# Altium PCB MB1710051255.PcbDoc (part 4 of 4)
Units mm, origin at the board's own origin, x right, y up, seen from the top; angles counter-clockwise.
Board outline 209.55 x 153.67 mm, 2 copper layers (Top Layer, Bottom Layer); 288 components, 212 nets, 1030 pads, 414 vias.
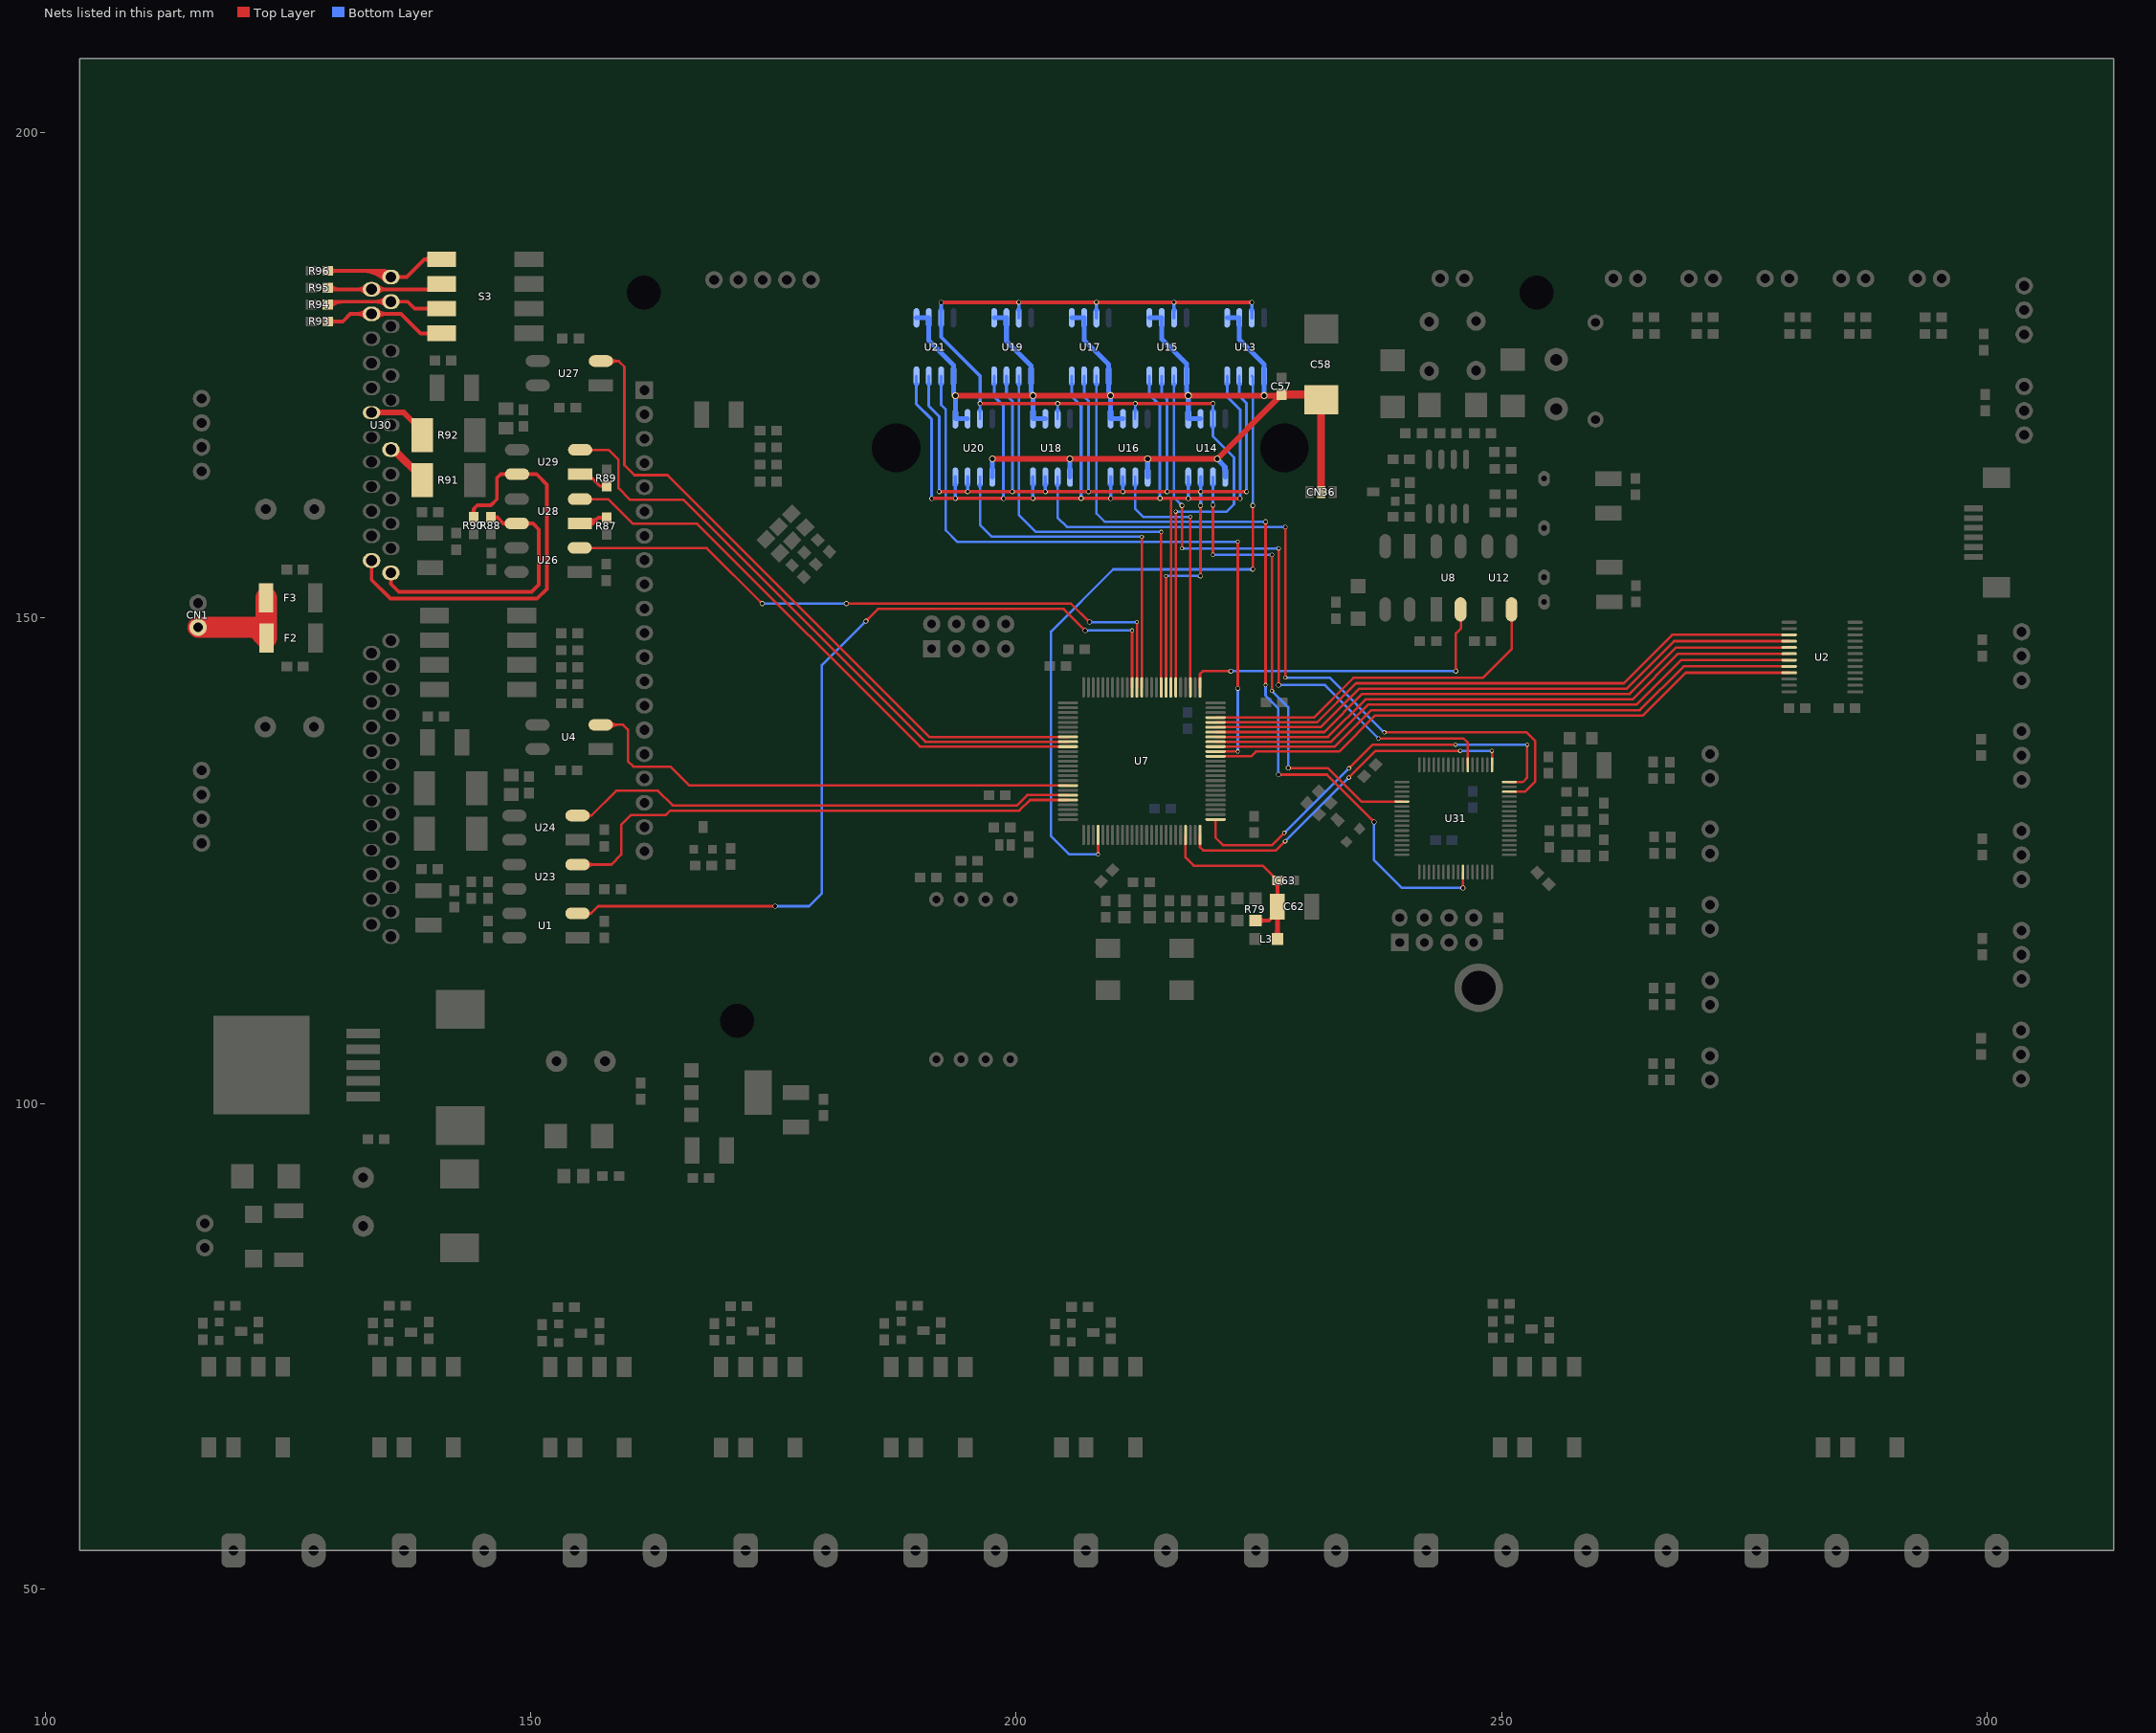
[diagram p4: the nets of this part, all layers, seen from the top]

## Via types
v1: diameter 0.7, hole 0.5, Top Layer to Bottom Layer, 231 vias
v2: diameter 0.5, hole 0.38, Top Layer to Bottom Layer, 67 vias
v3: diameter 0.5, hole 0.35, Top Layer to Bottom Layer, 64 vias
v4: diameter 0.42, hole 0.3, Top Layer to Bottom Layer, 27 vias
v5: diameter 0.45, hole 0.32, Top Layer to Bottom Layer, 8 vias
v6: diameter 0.8, hole 0.6, Top Layer to Bottom Layer, 8 vias
v7: diameter 1, hole 0.8, Top Layer to Bottom Layer, 4 vias
v8: diameter 0.45, hole 0.35, Top Layer to Bottom Layer, 3 vias
v9: diameter 1.2, hole 1, Top Layer to Bottom Layer, 1 vias
v10: diameter 0.6, hole 0.45, Top Layer to Bottom Layer, 1 vias

## Nets (pads, with @x,y where several pads share a name; then routed paths per layer and width w, separated by ;. In a path a pad name is that pad's centre, name@x,y a point inside that pad or via, vN(x,y) a via of type N, cw(c..) or ccw(c..) an arc to the next point about the centre after c; other vN are vias at no path point) (continued)
NetR87_1: R87.1 U28.1 | length 7
  Top Layer w0.38: U28.1@155.054,159.745 156.367,159.745 ; U28.1@155.716,159.772 ccw(c156.018,160.465) 156.552,159.931 ; U28.1@155.868,160.121 ccw(c156.257,161.014) 156.947,160.325 ; U28.1@156.071,159.562 cw(c156.367,159.414) 156.367,159.745 ; U28.1@156.071,159.928 ccw(c156.367,160.076) 156.367,159.745 ; R87.1@157.591,160.106 ccw(c157.062,159.576) 157.062,160.325 ccw(c157.062,161.073) R87.1@157.591,160.544 ; R87.1@157.81,160.325 156.947,160.325 ; 156.367,159.745 156.947,160.325
NetR88_2: R88.2 U28.4 U30.1 | length 30.1
  Top Layer w0.38: U30.1@135.592,154.652 135.592,153.511 136.398,152.705 150.089,152.705 150.825,153.441 150.825,159.131 150.211,159.745 U28.4@148.554,159.745 147.138,159.745 ; R88.2@145.872,160.374 146.509,160.374 ; R88.2@146.116,160.183 cw(c146.509,159.875) 146.509,160.374 ; R88.2@146.116,160.565 ccw(c146.509,160.873) 146.509,160.374 ; U28.4@147.563,159.517 ccw(c147.138,159.235) 147.138,159.745 ; U28.4@147.563,159.972 cw(c147.138,160.255) 147.138,159.745 ; 146.509,160.374 147.138,159.745
NetR89_1: R89.1 U29.1 | length 4.1
  Top Layer w0.3: U29.1@155.079,164.825 155.901,164.825 157.15,163.576 ; R89.1@157.521,163.38 ccw(c157.15,163.128) 157.15,163.576 ; R89.1@157.521,163.772 cw(c157.15,164.024) 157.15,163.576 ; R89.1@157.81,163.576 157.15,163.576
NetR90_1: R90.1 U29.4 U30.2 | length 44.9
  Top Layer w0.38: U30.2@133.592,155.922 133.592,153.936 135.534,151.994 150.647,151.994 151.663,153.01 151.663,163.754 150.592,164.825 U29.4@148.579,164.825 146.892,164.825 146.507,164.44 146.507,162.23 145.898,161.62 144.475,161.62 144.094,161.239 R90.1@144.094,160.376 ; R90.1@143.875,160.645 ccw(c143.346,161.174) 144.094,161.174 ccw(c144.843,161.174) R90.1@144.313,160.645
NetR91_2: R91.2 U30.11 | length 4.7
  Top Layer w0.8: U30.11@135.592,167.352 135.873,167.352 138.829,164.396 R91.2@138.829,164.186
NetR92_2: R92.2 U30.14 | length 6.4
  Top Layer w0.6: U30.14@133.592,171.162 136.915,171.162 138.829,169.248 R92.2@138.829,168.859
NetR93_2: R93.2 S3.8 U30.22 | length 18.3
  Top Layer w0.38: R93.2@129.081,180.543 130.632,180.543 131.411,181.322 U30.22@133.592,181.322 136.635,181.322 138.633,179.324 S3.8@140.809,179.324 ; R93.2@129.35,180.324 cw(c129.879,179.795) 129.879,180.543 cw(c129.879,181.292) R93.2@129.35,180.762 ; U30.22@133.046,180.926 ccw(c132.09,179.97) 132.09,181.322 ccw(c132.09,182.674) U30.22@133.046,181.718 ; U30.22@134.138,180.926 cw(c135.094,179.97) 135.094,181.322 cw(c135.094,182.674) U30.22@134.138,181.718
NetR94_2: R94.2 S3.7 U30.23 | length 16.3
  Top Layer w0.38: R94.2@129.081,182.27 129.403,182.592 U30.23@135.592,182.592 137.296,182.592 138.024,181.864 S3.7@140.809,181.864 ; R94.2@129.082,182.345 cw(c129.677,181.75) 129.677,182.592 ; R94.2@129.35,182.077 cw(c130.594,180.832) 130.594,182.592 ; U30.23@135.046,182.196 ccw(c134.09,181.24) 134.09,182.592 ccw(c134.09,183.944) U30.23@135.046,182.988
NetR95_2: R95.2 S3.6 U30.24 | length 17.3
  Top Layer w0.38: R95.2@129.081,184.023 129.242,183.862 U30.24@133.592,183.862 140.267,183.862 S3.6@140.809,184.404 ; R95.2@129.35,184.242 ccw(c130.268,185.16) 130.268,183.862 ; U30.24@133.046,183.466 ccw(c132.09,182.51) 132.09,183.862 ccw(c132.09,185.214) U30.24@133.046,184.258 ; U30.24@134.138,183.466 cw(c135.094,182.51) 135.094,183.862 cw(c135.094,185.214) U30.24@134.138,184.258
NetR96_2: R96.2 S3.5 U30.25 | length 22.2
  Top Layer w0.38: R96.2@129.081,185.776 134.948,185.776 ; R96.2@129.35,185.531 cw(c129.941,184.94) 129.941,185.776 ; R96.2@129.35,185.969 ccw(c129.818,186.437) 129.818,185.776 ; 132.536,185.776 cw(c132.536,182.226) U30.25@135.046,184.736 ; 133.454,185.776 cw(c133.454,183.144) U30.25@135.315,185.005 ; 134.371,185.776 cw(c134.371,184.061) U30.25@135.583,185.273 ; U30.25@134.979,185.447 ccw(c134.766,185.593) 134.948,185.776 ; U30.25@135.308,185.676 cw(c135.217,186.044) 134.948,185.776 ; S3.5@139.584,186.633 ccw(c139.04,186.311) 139.04,186.944 ; S3.5@139.584,187.255 cw(c139.04,187.577) 139.04,186.944 ; S3.5@140.809,186.944 139.04,186.944 ; 134.948,185.776 U30.25@135.592,185.132 137.228,185.132 139.04,186.944
NetU1_2: U1.2 U7.65 | length 94.3
  Top Layer w0.254: U1.2@154.8,119.573 156.2,119.573 ; U1.2@155.877,119.369 cw(c156.2,119.215) 156.2,119.573 ; U1.2@155.877,119.776 ccw(c156.2,119.931) 156.2,119.573 ; v2@175.071,120.233 ccw(c174.861,120.023) 174.861,120.32 ccw(c174.861,120.617) v2@175.071,120.407 ; v2(175.158,120.32) 156.947,120.32 156.2,119.573 ; v3(184.506,149.682) 185.75,150.927 204.902,150.927 v2(207.112,148.717) ; v3@184.506,149.805 ccw(c184.506,150.102) 184.716,149.892 ccw(c184.926,149.682) v3@184.629,149.682 ; v2@206.989,148.717 ccw(c206.692,148.717) 206.902,148.927 ccw(c207.112,149.137) v2@207.112,148.84 ; U7.65@211.928,142.855 v4(211.928,148.717)
  Bottom Layer w0.254: v2(175.158,120.32) 178.638,120.32 179.984,121.666 179.984,145.161 v3(184.506,149.682) ; v2@175.245,120.233 cw(c175.455,120.023) 175.455,120.32 cw(c175.455,120.617) v2@175.245,120.407 ; v3@184.383,149.682 cw(c184.086,149.682) 184.296,149.472 cw(c184.506,149.262) v3@184.506,149.559 ; v2(207.112,148.717) v4(211.928,148.717) ; v2@207.199,148.63 cw(c207.409,148.42) 207.409,148.717 cw(c207.409,149.014) v2@207.199,148.804
NetU2_15: U2.15 U7.46 | length 62.8
  Top Layer w0.254: U7.46@220.528,139.255 230.974,139.255 235.006,143.286 262.59,143.286 267.572,148.268 U2.15@279.61,148.268
NetU2_16: U2.16 U7.45 | length 62.8
  Top Layer w0.254: U7.45@220.528,138.755 231.363,138.755 235.341,142.732 262.874,142.732 267.76,147.618 U2.16@279.61,147.618
NetU2_17: U2.17 U7.44 | length 62.7
  Top Layer w0.254: U7.44@220.528,138.255 231.727,138.255 235.65,142.178 263.184,142.178 267.973,146.968 U2.17@279.61,146.968
NetU2_18: U2.18 U7.43 | length 62.6
  Top Layer w0.254: U7.43@220.528,137.755 232.091,137.755 235.96,141.624 263.468,141.624 268.162,146.318 U2.18@279.61,146.318
NetU2_19: U2.19 U7.42 | length 62.6
  Top Layer w0.254: U7.42@220.528,137.255 232.429,137.255 236.244,141.07 263.879,141.07 268.477,145.668 U2.19@279.61,145.668
NetU2_20: U2.20 U7.41 | length 62.5
  Top Layer w0.254: U7.41@220.528,136.755 232.818,136.755 236.579,140.516 264.24,140.516 268.741,145.018 U2.20@279.61,145.018
NetU2_21: U2.21 U7.39 | length 62.6
  Top Layer w0.254: U7.39@220.528,135.755 224.198,135.755 224.688,136.246 233.248,136.246 236.965,139.962 264.549,139.962 268.955,144.368 U2.21@279.61,144.368
NetU4_2: U4.2 U7.93 | length 54.4
  Top Layer w0.254: U4.2@157.187,139.004 159.497,139.004 159.995,138.506 159.995,135.255 160.551,134.698 164.387,134.698 166.33,132.755 U7.93@205.328,132.755 ; U4.2@158.172,138.669 cw(c158.979,137.862) 158.979,139.004 cw(c158.979,140.146) U4.2@158.172,139.338
NetU7_4: U7.4 U13.6 | length 74
  Top Layer w0.254: v4(208.428,125.654) U7.4@208.428,127.655 ; v3@224.267,161.508 cw(c224.057,161.298) 224.354,161.298 cw(c224.651,161.298) v3@224.441,161.508 ; v3@224.271,155.103 ccw(c224.061,155.313) 224.358,155.313 ccw(c224.655,155.313) v3@224.445,155.103 ; v3(224.354,161.595) v3(224.358,155.016)
  Bottom Layer w0.254: v4(208.428,125.654) 205.461,125.654 203.581,127.533 203.581,148.615 209.982,155.016 v3(224.358,155.016) ; U13.6@224.256,174.923 224.354,174.825 v3(224.354,161.595) ; v3@224.267,161.682 ccw(c224.057,161.892) 224.354,161.892 ccw(c224.651,161.892) v3@224.441,161.682 ; v3@224.271,154.929 ccw(c224.061,154.719) 224.061,155.016 ccw(c224.061,155.313) v3@224.271,155.103
NetU7_25: U7.25 U31.17 | length 38.8
  Top Layer w0.254: U7.25@218.928,127.655 218.928,126.385 219.253,126.06 226.746,126.06 v5(227.698,127.013) ; v5@227.6,127.013 cw(c227.364,127.013) 227.531,126.845 cw(c227.698,126.678) v5@227.698,126.915 ; v5(234.251,133.566) 237.007,136.322 v4(245.72,136.322) ; v5@234.251,133.664 ccw(c234.251,133.9) 234.419,133.733 ccw(c234.586,133.566) v5@234.349,133.566 ; v4@248.938,136.263 cw(c248.773,136.099) 249.006,136.099 ; v4(248.996,136.322) 249.006,136.312 U31.17@249.006,134.88
  Bottom Layer w0.254: v5(227.698,127.013) v5(234.251,133.566) ; v5@227.698,127.111 ccw(c227.698,127.347) 227.866,127.18 ccw(c228.033,127.013) v5@227.796,127.013 ; v5@234.154,133.566 cw(c233.917,133.566) 234.084,133.399 cw(c234.251,133.231) v5@234.251,133.468 ; v4(245.72,136.322) v4(248.996,136.322)
NetU7_26: U7.26 U31.16 | length 45.5
  Top Layer w0.254: U7.26@220.528,129.255 220.528,127.376 221.29,126.614 226.36,126.614 v5(227.609,127.864) ; v5@227.511,127.864 cw(c227.275,127.864) 227.442,127.696 cw(c227.609,127.529) v5@227.609,127.766 ; v5(234.264,134.518) 236.701,136.955 v4(245.237,136.955) ; v5@234.264,134.616 ccw(c234.264,134.853) 234.431,134.686 ccw(c234.599,134.518) v5@234.362,134.518 ; U31.16@250.781,133.105 252.18,133.105 252.628,133.553 v4(252.628,136.959)
  Bottom Layer w0.254: v5(227.609,127.864) v5(234.264,134.518) ; v5@227.609,127.962 ccw(c227.609,128.198) 227.777,128.031 ccw(c227.944,127.864) v5@227.707,127.864 ; v5@234.166,134.518 cw(c233.93,134.518) 234.097,134.351 cw(c234.264,134.184) v5@234.264,134.42 ; v4(245.237,136.955) 245.241,136.959 v4(252.628,136.959)
NetU7_40: U7.40 U21.6 | length 72.1
  Top Layer w0.254: U7.40@220.528,136.255 v4(222.818,136.255) ; v3@222.731,142.835 ccw(c222.521,143.045) 222.818,143.045 ccw(c223.115,143.045) v3@222.905,142.835 ; v3(222.818,142.748) v4(222.818,157.861)
  Bottom Layer w0.254: U21.6@192.139,174.101 cw(c191.843,173.805) 192.261,173.805 cw(c192.679,173.805) U21.6@192.383,174.101 ; U21.6@192.261,174.923 192.261,171.95 192.735,171.475 192.735,159.029 193.904,157.861 v4(222.818,157.861) ; v3@222.731,142.661 cw(c222.521,142.451) 222.818,142.451 cw(c223.115,142.451) v3@222.905,142.661 ; v4(222.818,136.255) v3(222.818,142.748)
NetU7_47: U7.47 U12.2 | length 37.5
  Top Layer w0.254: U7.47@220.528,139.755 230.636,139.755 234.721,143.84 248.056,143.84 251.018,146.802 U12.2@251.018,150.889
NetU7_51: U7.51 U8.2 | length 36.3
  Top Layer w0.254: U7.51@218.928,142.855 218.928,144.252 219.202,144.526 v3(222.098,144.526) ; v3@222.011,144.439 ccw(c221.801,144.229) 221.801,144.526 ccw(c221.801,144.823) v3@222.011,144.613 ; v3@245.201,144.613 ccw(c244.991,144.823) 245.288,144.823 ccw(c245.585,144.823) v3@245.375,144.613 ; v3(245.288,144.526) 245.288,148.412 245.821,148.946 245.821,150.828 U8.2@245.76,150.889
  Bottom Layer w0.254: v3(222.098,144.526) v3(245.288,144.526) ; v3@222.185,144.439 cw(c222.395,144.229) 222.395,144.526 cw(c222.395,144.823) v3@222.185,144.613 ; v3@245.201,144.439 ccw(c244.991,144.229) 244.991,144.526 ccw(c244.991,144.823) v3@245.201,144.613
NetU7_53: U7.53 U16.6 | length 27.5
  Top Layer w0.254: U7.53@217.928,142.855 v4@217.928,160.426
  Bottom Layer w0.254: U16.6@212.134,163.701 cw(c211.838,163.405) 212.256,163.405 cw(c212.674,163.405) U16.6@212.378,163.701 ; U16.6@212.256,164.523 212.256,161.239 213.069,160.426 v4(217.932,160.426)
NetU7_56: U7.56 U13.3 U14.3 U15.3 U16.3 U17.3 U18.3 U19.3 U20.3 U21.3 | length 122.9
  Top Layer w0.254: U7.56@216.428,142.855 v4@216.428,160.96
  Top Layer w0.35: v3(192.261,182.516) v3(224.257,182.516) ; v3(196.261,172.11) v3(204.261,172.11) v3(220.256,172.11)
  Bottom Layer w0.254: U20.3@196.139,171.345 ccw(c195.843,171.641) 196.261,171.641 ccw(c196.679,171.641) U20.3@196.383,171.345 ; v3@196.174,172.023 cw(c195.964,171.813) 196.261,171.813 cw(c196.558,171.813) v3@196.348,172.023 ; U20.3@196.261,170.523 v3(196.261,172.11) ; U18.3@204.139,171.345 ccw(c203.843,171.641) 204.261,171.641 ccw(c204.679,171.641) U18.3@204.383,171.345 ; v3@204.174,172.023 cw(c203.964,171.813) 204.261,171.813 cw(c204.558,171.813) v3@204.348,172.023 ; U18.3@204.261,170.523 v3(204.261,172.11) ; U16.3@212.134,171.345 ccw(c211.838,171.641) 212.256,171.641 ccw(c212.674,171.641) U16.3@212.378,171.345 ; v3@212.169,172.023 cw(c211.959,171.813) 212.256,171.813 cw(c212.553,171.813) v3@212.343,172.023 ; U16.3@212.256,170.523 v3(212.256,172.11) ; v4(216.433,160.96) 221.666,160.96 222.428,161.722 222.428,166.548 220.256,168.72 U14.3@220.256,170.523 v3(220.256,172.11) ; U14.3@220.134,169.701 cw(c219.838,169.405) 220.256,169.405 cw(c220.674,169.405) U14.3@220.378,169.701 ; U14.3@220.134,171.345 ccw(c219.838,171.641) 220.256,171.641 ccw(c220.674,171.641) U14.3@220.378,171.345 ; v3@220.169,172.023 cw(c219.959,171.813) 220.256,171.813 cw(c220.553,171.813) v3@220.343,172.023
  Bottom Layer w0.35: U21.3@192.173,180.135 cw(c191.959,179.921) 192.261,179.921 cw(c192.563,179.921) U21.3@192.349,180.135 ; U21.3@192.173,181.711 ccw(c191.959,181.925) 192.261,181.925 ccw(c192.563,181.925) U21.3@192.349,181.711 ; v3(192.261,182.516) U21.3@192.261,180.923 192.261,178.935 196.261,174.935 v3(196.261,172.11) ; U19.3@200.173,181.711 ccw(c199.959,181.925) 200.261,181.925 ccw(c200.563,181.925) U19.3@200.349,181.711 ; U19.3@200.261,180.923 v3(200.261,182.524) ; U17.3@208.168,181.711 ccw(c207.954,181.925) 208.256,181.925 ccw(c208.558,181.925) U17.3@208.344,181.711 ; U17.3@208.256,180.923 v3(208.256,182.523) ; U15.3@216.168,181.711 ccw(c215.954,181.925) 216.256,181.925 ccw(c216.558,181.925) U15.3@216.344,181.711 ; U15.3@216.256,180.923 v3(216.256,182.524) ; U13.3@224.168,181.711 ccw(c223.954,181.925) 224.256,181.925 ccw(c224.558,181.925) U13.3@224.344,181.711 ; U13.3@224.256,180.923 v3(224.257,182.516)
NetU7_57: U7.57 U13.8 U14.8 U15.8 U16.8 U17.8 U18.8 U19.8 U20.8 U21.8 | length 130.3
  Top Layer w0.254: 215.925,162.311 215.928,162.308 U7.57@215.928,142.855
  Top Layer w0.35: v3@191.287,162.311 v3(193.721,162.311) 215.925,162.311 v3@217.724,162.311 ; v3(217.716,162.306) v3(223.063,162.306)
  Bottom Layer w0.3: U21.8@189.615,174.117 cw(c189.359,173.861) 189.721,173.861 cw(c190.083,173.861) U21.8@189.827,174.117 ; U21.8@189.721,174.923 189.721,172.026 191.287,170.459 v3(191.287,162.306) ; U19.8@197.615,174.117 cw(c197.359,173.861) 197.721,173.861 cw(c198.083,173.861) U19.8@197.827,174.117 ; U19.8@197.721,174.923 197.721,172.84 198.679,171.882 v3(198.679,162.306) ; U17.8@205.61,174.117 cw(c205.354,173.861) 205.716,173.861 cw(c206.078,173.861) U17.8@205.822,174.117 ; U17.8@205.716,174.923 205.716,172.82 206.68,171.856 v3(206.68,162.331) ; U15.8@213.61,174.117 cw(c213.354,173.861) 213.716,173.861 cw(c214.078,173.861) U15.8@213.822,174.117 ; U15.8@213.716,174.923 213.716,172.999 214.808,171.907 v3(214.808,162.331) ; U13.8@221.61,174.117 cw(c221.354,173.861) 221.716,173.861 cw(c222.078,173.861) U13.8@221.822,174.117 ; U13.8@221.716,174.923 221.716,172.797 223.063,171.45 v3(223.063,162.306)
  Bottom Layer w0.35: U20.8@193.633,163.735 cw(c193.419,163.521) 193.721,163.521 cw(c194.023,163.521) U20.8@193.809,163.735 ; U20.8@193.721,164.523 v3(193.721,162.311) v3@193.726,162.306 ; U18.8@201.633,163.735 cw(c201.419,163.521) 201.721,163.521 cw(c202.023,163.521) U18.8@201.809,163.735 ; v3(201.721,162.312) U18.8@201.721,164.523 ; U16.8@209.628,163.735 cw(c209.414,163.521) 209.716,163.521 cw(c210.018,163.521) U16.8@209.804,163.735 ; v3(209.716,162.306) U16.8@209.716,164.523 ; U14.8@217.628,163.735 cw(c217.414,163.521) 217.716,163.521 cw(c218.018,163.521) U14.8@217.804,163.735 ; v3(217.716,162.306) U14.8@217.716,164.523
NetU7_58: U7.58 U13.7 U14.7 U15.7 U16.7 U17.7 U18.7 U19.7 U20.7 U21.7 | length 127.6
  Top Layer w0.254: U7.58@215.428,142.855 v4(215.428,154.33)
  Top Layer w0.3: v3(218.973,154.33) v3(218.973,161.595)
  Top Layer w0.35: v3(192.049,163.017) v3(194.991,163.017) v3(199.593,163.017) v3(202.991,163.017) v3(210.986,163.017) v3(215.544,163.017) v3(218.986,163.017) v3(223.723,163.017)
  Bottom Layer w0.254: v4(215.428,154.33) v3(218.973,154.33) ; v3@218.886,154.243 ccw(c218.676,154.033) 218.676,154.33 ccw(c218.676,154.627) v3@218.886,154.417
  Bottom Layer w0.3: U21.7@190.885,174.117 cw(c190.629,173.861) 190.991,173.861 cw(c191.353,173.861) U21.7@191.097,174.117 ; U21.7@190.991,174.923 190.991,171.848 192.049,170.79 v3(192.049,163.017) ; U19.7@198.885,174.117 cw(c198.629,173.861) 198.991,173.861 cw(c199.353,173.861) U19.7@199.097,174.117 ; U19.7@198.991,174.923 198.991,172.967 199.593,172.364 v3(199.593,163.017) ; U17.7@206.88,174.117 cw(c206.624,173.861) 206.986,173.861 cw(c207.348,173.861) U17.7@207.092,174.117 ; U17.7@206.986,174.923 206.986,172.82 207.442,172.364 v3(207.442,163.017) ; U15.7@214.88,174.117 cw(c214.624,173.861) 214.986,173.861 cw(c215.348,173.861) U15.7@215.092,174.117 ; U15.7@214.986,174.923 214.986,173.103 215.544,172.545 v3(215.544,163.017) ; U13.7@222.88,174.117 cw(c222.624,173.861) 222.986,173.861 cw(c223.348,173.861) U13.7@223.092,174.117 ; U13.7@222.986,174.923 222.986,172.848 223.723,172.11 v3(223.723,163.017)
  Bottom Layer w0.35: U20.7@194.903,163.735 cw(c194.689,163.521) 194.991,163.521 cw(c195.293,163.521) U20.7@195.079,163.735 ; v3(194.991,163.017) U20.7@194.991,164.523 ; U18.7@202.903,163.735 cw(c202.689,163.521) 202.991,163.521 cw(c203.293,163.521) U18.7@203.079,163.735 ; v3(202.991,163.017) U18.7@202.991,164.523 ; U16.7@210.898,163.735 cw(c210.684,163.521) 210.986,163.521 cw(c211.288,163.521) U16.7@211.074,163.735 ; v3(210.986,163.017) U16.7@210.986,164.523 ; U14.7@218.898,163.735 cw(c218.684,163.521) 218.986,163.521 cw(c219.288,163.521) U14.7@219.074,163.735 ; v3(218.973,161.595) 218.986,161.607 v3(218.986,163.017) U14.7@218.986,164.523
NetU7_59: U7.59 U19.6 | length 46.4
  Top Layer w0.254: U7.59@214.928,142.855 v4(214.928,158.877)
  Bottom Layer w0.254: U19.6@200.139,174.101 cw(c199.843,173.805) 200.261,173.805 cw(c200.679,173.805) U19.6@200.383,174.101 ; U19.6@200.261,174.923 200.261,160.622 202.006,158.877 v4(214.928,158.877)
NetU7_63: U7.63 U20.6 | length 38.3
  Top Layer w0.254: U7.63@212.928,142.855 v4(212.928,158.369)
  Bottom Layer w0.254: U20.6@196.139,163.701 cw(c195.843,163.405) 196.261,163.405 cw(c196.679,163.405) U20.6@196.383,163.701 ; U20.6@196.261,164.523 196.261,159.593 197.485,158.369 v4(212.928,158.369)
NetU7_64: U7.64 U26.2 | length 70.1
  Top Layer w0.254: U26.2@155.028,157.241 155.069,157.201 168.127,157.201 v2(173.838,151.49) ; v2@173.715,151.49 ccw(c173.418,151.49) 173.628,151.7 ccw(c173.838,151.91) v2@173.838,151.613 ; v2(182.504,151.49) 205.634,151.49 v2(207.543,149.581) ; v2@182.591,151.403 cw(c182.801,151.193) 182.801,151.49 cw(c182.801,151.787) v2@182.591,151.577 ; v2@207.42,149.581 ccw(c207.123,149.581) 207.333,149.791 ccw(c207.543,150.001) v2@207.543,149.704 ; U7.64@212.428,142.855 v4(212.428,149.581)
  Bottom Layer w0.254: v2(173.838,151.49) v2(182.504,151.49) ; v2@173.925,151.403 cw(c174.135,151.193) 174.135,151.49 cw(c174.135,151.787) v2@173.925,151.577 ; v2@182.417,151.403 ccw(c182.207,151.193) 182.207,151.49 ccw(c182.207,151.787) v2@182.417,151.577 ; v2(207.543,149.581) v4(212.428,149.581) ; v2@207.63,149.494 cw(c207.84,149.284) 207.84,149.581 cw(c207.84,149.878) v2@207.63,149.668
NetU7_83: U7.83 U27.2 | length 71.9
  Top Layer w0.254: U27.2@157.213,176.469 159.055,176.469 159.639,175.885 159.639,165.735 160.655,164.719 164.084,164.719 191.048,137.755 U7.83@205.328,137.755 ; U27.2@158.197,176.134 cw(c159.005,175.327) 159.005,176.469 cw(c159.005,177.611) U27.2@158.197,176.803
NetU7_84: U7.84 U29.2 | length 64.4
  Top Layer w0.254: U29.2@155.079,167.325 157.998,167.325 159.029,166.294 159.029,163.373 160.198,162.204 165.684,162.204 190.634,137.255 U7.84@205.328,137.255
NetU7_85: U7.85 U28.2 | length 60.8
  Top Layer w0.254: U28.2@155.054,162.245 157.973,162.245 160.503,159.715 167.132,159.715 190.092,136.755 U7.85@205.328,136.755
NetU7_95: U7.95 U24.2 | length 53.6
  Top Layer w0.254: U24.2@154.8,129.657 156.25,129.657 ; U24.2@155.864,129.428 cw(c156.25,129.216) 156.25,129.657 ; U24.2@155.864,129.885 ccw(c156.25,130.098) 156.25,129.657 ; U7.95@205.328,131.755 201.122,131.755 200.076,130.708 164.592,130.708 163.093,132.207 158.801,132.207 156.25,129.657
NetU7_96: U7.96 U23.2 | length 56.9
  Top Layer w0.254: U23.2@154.8,124.602 158.282,124.602 159.309,125.628 159.309,128.702 160.325,129.718 163.906,129.718 164.343,130.154 200.309,130.154 201.41,131.255 U7.96@205.328,131.255 ; U23.2@155.784,124.268 cw(c156.592,123.46) 156.592,124.602 cw(c156.592,125.744) U23.2@155.784,124.936
NetU14_6: U14.6 U31.37 | length 53.2
  Top Layer w0.254: v3@220.169,161.533 cw(c219.959,161.323) 220.256,161.323 cw(c220.553,161.323) v3@220.343,161.533 ; v4(220.256,156.515) v3(220.256,161.62) ; v5@226.27,156.446 cw(c226.103,156.278) 226.339,156.278 cw(c226.576,156.278) v5@226.409,156.446 ; v4(226.339,142.494) v5(226.339,156.515) ; v2(228.016,134.544) 232.105,134.544 235.544,131.105 U31.37@239.731,131.105 ; v2@228.103,134.457 cw(c228.313,134.247) 228.313,134.544 cw(c228.313,134.841) v2@228.103,134.631
  Bottom Layer w0.254: U14.6@220.134,163.701 cw(c219.838,163.405) 220.256,163.405 cw(c220.674,163.405) U14.6@220.378,163.701 ; v3@220.169,161.707 ccw(c219.959,161.917) 220.256,161.917 ccw(c220.553,161.917) v3@220.343,161.707 ; v4(220.256,156.515) v5(226.339,156.515) ; v3(220.256,161.62) U14.6@220.256,164.523 ; v5@226.27,156.446 ccw(c226.103,156.278) 226.103,156.515 ccw(c226.103,156.751) v5@226.27,156.584 ; v4(226.339,142.494) 228.016,140.818 v2(228.016,134.544) v2@228.016,134.518 ; v2@227.929,134.631 ccw(c227.719,134.841) 228.016,134.841 ccw(c228.313,134.841) v2@228.103,134.631
NetU15_6: U15.6 U31.22 | length 69.4
  Top Layer w0.254: v3@216.981,161.508 cw(c216.771,161.298) 217.068,161.298 cw(c217.365,161.298) v3@217.155,161.508 ; v4@217.068,157.328 v3(217.068,161.595) ; v2@226.938,143.191 ccw(c226.728,143.401) 227.025,143.401 ccw(c227.322,143.401) v2@227.112,143.191 ; v5@226.956,157.106 cw(c226.789,156.939) 227.025,156.939 cw(c227.262,156.939) v5@227.094,157.106 ; v2(227.025,143.104) v5(227.025,157.175) ; v4(237.312,137.592) 237.314,137.59 246.077,137.59 246.506,137.161 U31.22@246.506,134.88
  Bottom Layer w0.254: U15.6@216.134,174.101 cw(c215.838,173.805) 216.256,173.805 cw(c216.674,173.805) U15.6@216.378,174.101 ; U15.6@216.256,174.923 216.256,162.407 v3(217.068,161.595) ; v3@216.945,161.595 ccw(c216.648,161.595) 216.858,161.805 ccw(c217.068,162.015) v3@217.068,161.718 ; v4(217.068,157.175) v5(227.025,157.175) ; v5@226.956,157.106 ccw(c226.789,156.939) 226.789,157.175 ccw(c226.789,157.412) v5@226.956,157.244 ; v2(227.025,143.104) 231.8,143.104 v4(237.312,137.592) ; v2@227.112,143.017 cw(c227.322,142.807) 227.322,143.104 cw(c227.322,143.401) v2@227.112,143.191
NetU17_6: U17.6 U31.58 | length 90.2
  Top Layer w0.254: v3@225.592,159.831 cw(c225.382,159.621) 225.679,159.621 cw(c225.976,159.621) v3@225.766,159.831 ; v4(225.679,143.104) v3(225.679,159.918) ; v2(227,133.883) 227.016,133.867 231.995,133.867 v2(236.855,129.007) ; v2@227.087,133.796 cw(c227.257,133.627) 227.257,133.867 ; v2@227.087,133.97 ccw(c227.337,134.22) 227.337,133.867 ; v2@236.732,129.007 ccw(c236.435,129.007) 236.645,129.217 ccw(c236.855,129.427) v2@236.855,129.13 ; v2@245.919,122.293 ccw(c245.709,122.503) 246.006,122.503 ccw(c246.303,122.503) v2@246.093,122.293 ; v2(246.006,122.206) U31.58@246.006,123.83
  Bottom Layer w0.254: U17.6@208.134,174.101 cw(c207.838,173.805) 208.256,173.805 cw(c208.674,173.805) U17.6@208.378,174.101 ; U17.6@208.256,174.923 208.256,160.782 209.12,159.918 v3(225.679,159.918) ; v4(225.679,143.104) 225.679,142.011 227,140.691 v2(227,133.883) ; v2@226.913,133.97 ccw(c226.703,134.18) 227,134.18 ccw(c227.297,134.18) v2@227.087,133.97 ; v2@236.768,128.92 cw(c236.558,128.71) 236.855,128.71 cw(c237.152,128.71) v2@236.942,128.92 ; v2(236.855,129.007) 236.855,125.07 239.719,122.206 v2(246.006,122.206) ; v2@245.919,122.119 ccw(c245.709,121.909) 245.709,122.206 ccw(c245.709,122.503) v2@245.919,122.293
NetU18_6: U18.6 U31.14 | length 80.7
  Top Layer w0.254: v5@227.642,159.316 cw(c227.474,159.148) 227.711,159.148 cw(c227.948,159.148) v5@227.78,159.316 ; v4(227.711,143.866) v5(227.711,159.385) ; v4(237.922,138.227) 252.578,138.227 253.441,137.363 253.441,133.147 252.4,132.105 U31.14@250.781,132.105
  Bottom Layer w0.254: U18.6@204.139,163.701 cw(c203.843,163.405) 204.261,163.405 cw(c204.679,163.405) U18.6@204.383,163.701 ; U18.6@204.261,164.523 204.261,160.331 205.207,159.385 v5(227.711,159.385) ; v5@227.642,159.316 ccw(c227.474,159.148) 227.474,159.385 ccw(c227.474,159.622) v5@227.642,159.454 ; v4(227.711,143.866) 232.283,143.866 v4(237.922,138.227)
VDD: C57.2 C58.1 CN36.2 U13.1 U13.2 U13.5 U14.1 U14.2 U14.5 U15.1 U15.2 U15.5 U16.1 U16.2 U16.5 U17.1 U17.2 U17.5 U18.1 U18.2 U18.5 U19.1 U19.2 U19.5 U20.1 U20.2 U20.5 U21.1 U21.2 U21.5 | length 155.3
  Top Layer w0.6: v1(193.721,172.918) C57.2@226.97,172.918 ; v1(197.531,166.391) 220.696,166.391 v1(220.701,166.395) C57.2@226.97,172.664 ; 226.711,172.918 ccw(c226.711,173.594) C57.2@227.189,173.116 ; C57.2@226.903,172.598 cw(c227.33,172.171) C57.2@227.33,172.775
  Top Layer w0.8: C57.2@227.33,173.025 230.894,173.025 C58.1@231.419,172.499 231.4,172.48 CN36.2@231.4,162.966
  Bottom Layer w0.5: U21.1@189.721,180.923 U21.2@190.991,180.923 190.991,178.604 193.531,176.064 U21.5@193.531,174.923 193.531,173.108 v1(193.721,172.918) U20.1@193.721,170.523 U20.2@194.991,170.523 ; U20.5@197.531,164.523 v1(197.531,166.391) ; U19.1@197.721,180.923 U19.2@198.991,180.923 198.991,178.529 201.531,175.989 U19.5@201.531,174.923 201.531,173.113 v1(201.721,172.923) U18.1@201.721,170.523 U18.2@202.991,170.523 ; U18.5@205.531,164.523 v1(205.531,166.39) ; U17.1@205.716,180.923 U17.2@206.986,180.923 206.986,178.637 209.526,176.097 U17.5@209.526,174.923 209.526,173.113 v1(209.716,172.923) U16.1@209.716,170.523 U16.2@210.986,170.523 ; U16.5@213.526,164.523 v1(213.526,166.395) ; U15.1@213.716,180.923 U15.2@214.986,180.923 214.986,178.739 217.526,176.199 U15.5@217.526,174.923 217.526,173.113 v1(217.716,172.923) U14.1@217.716,170.523 U14.2@218.986,170.523 ; v1(220.701,166.395) 221.526,165.57 U14.5@221.526,164.523 ; 221.195,165.901 cw(c220.518,165.223) U14.5@221.476,165.223 ; U13.1@221.716,180.923 U13.2@222.986,180.923 222.986,178.664 225.526,176.124 U13.5@225.526,174.923 v1(225.527,172.923)
VDDA: C62.1 C63.1 L3.2 R79.2 U7.22 | length 25.4
  Top Layer w0.254: U7.22@217.428,127.655 217.428,125.345 218.288,124.485 225.374,124.485 C63.1@226.898,122.961
  Top Layer w0.38: R79.2@224.638,118.847 226.035,118.847 C62.1@226.898,119.71 ; R79.2@224.963,118.559 cw(c225.658,117.864) 225.658,118.847 cw(c225.658,119.829) R79.2@224.963,119.134 ; C63.1@226.679,122.742 cw(c226.15,122.213) 226.898,122.213 cw(c227.647,122.213) C63.1@227.117,122.742 ; C62.1@226.898,120.269 C63.1@226.898,122.961
  Top Layer w0.5: L3.2@226.653,117.225 ccw(c226.061,117.817) 226.898,117.817 ccw(c227.736,117.817) L3.2@227.143,117.225 ; L3.2@226.898,116.942 226.898,119.71 C62.1@226.898,120.269
VM: CN1.2 F2.2 F3.2 | length 11.6
  Top Layer w2.2: CN1.2@115.722,149.042 121.671,149.042 F2.2@122.733,147.98 ; F3.2@122.733,152.095 F2.2@122.733,147.98 ; F2.2@122.758,147.955 F2.2@122.733,147.98
pads on no net: CN11.3 CN11.5 CN11.6 CN11.7 CN11.8 CN11.9 CN11.10 CN11.11 CN11.12 CN11.17 CN11.18 CN17.MP1 CN17.MP2 K1.1 K1.4 K1.5 K2.1 K2.4 K2.5 K3.1 K3.4 K3.5 K4.1 K4.4 K4.5 K5.1 K5.4 K5.5 K6.1 K6.4 K6.5 K7.1 K7.4 K7.5 K8.1 K8.4 K8.5 S1.3 S1.4 U2.10 U2.14 U3.3 U6.6 U7.8 U7.9 U7.15 U7.37 U7.62 U7.79 U7.80 U7.81 U7.82 U7.86 U7.87 U7.92 U7.97 U22.4 U22.5 U22.6 U22.7 U22.8 U25.19 U30.19 U31.2 U31.3 U31.4 U31.8 U31.9 U31.10 U31.11 U31.15 U31.20 U31.21 U31.23 U31.24 U31.25 U31.26 U31.27 U31.28 U31.29 U31.30 U31.33 U31.34 U31.35 U31.36 U31.38 U31.39 U31.40 U31.41 U31.44 U31.45 U31.50 U31.51 U31.52 U31.53 U31.54 U31.55 U31.56 U31.57 U31.59 U31.61 U31.62 Y1.2 Y1.4 Y2.2 Y2.4

## Polygon pours and split planes (outlines as drawn)
GND on Top Layer "Bottom Layer-No Net" (solid, remove dead copper, pour order 11): 112.669,113.155 114.918,113.155 156.193,113.155 157.286,114.247 158.352,115.314 158.352,117.955 158.352,118.717 158.352,188.974 157.489,188.974 114.995,188.974 113.725,187.704 112.669,186.648 112.669,184.974 112.669,113.155
GND on Top Layer "Bottom Layer-No Net" (solid, remove dead copper, pour order 8): 112.686,112.141 114.325,112.141 156.845,112.141 158.953,114.249 159.309,114.605 159.309,127.889 159.309,188.976 164.719,188.976 235.712,188.976 235.712,157.607 236.347,156.972 237.49,155.829 242.164,155.829 263.525,155.829 264.541,156.845 264.541,158.064 264.541,178.689 262.382,180.848 259.156,184.074 259.156,188.163 259.156,188.976 305.638,188.976 306.807,187.808 307.986,186.628 307.986,184.976 307.986,71.766 307.924,71.704 307.873,71.755 288.519,71.755 112.686,71.755 112.686,112.141
ISO on Top Layer "Bottom Layer-No Net" (solid, remove dead copper, pour order 12): 236.093,188.976 236.093,187.096 236.093,157.861 237.414,156.54 237.49,156.464 239.243,156.464 263.271,156.464 263.779,156.972 264.033,157.226 264.033,158.318 264.033,159.461 264.033,178.283 260.96,181.356 258.445,183.871 258.445,188.57 258.445,188.976 236.093,188.976
GND on Bottom Layer "Bottom Layer-No Net" (solid, remove dead copper, pour order 9): 112.686,113.157 114.935,113.157 156.21,113.157 157.302,114.249 158.369,115.316 158.369,117.958 158.369,118.72 158.369,188.976 157.505,188.976 115.011,188.976 113.741,187.706 112.686,186.651 112.686,184.976 112.686,113.157
GND on Bottom Layer "Bottom Layer-No Net" (solid, remove dead copper, pour order 7): 112.686,112.141 114.325,112.141 156.845,112.141 158.953,114.249 159.309,114.605 159.309,127.889 159.309,188.976 164.719,188.976 235.712,188.976 235.712,157.607 236.347,156.972 237.49,155.829 242.164,155.829 263.525,155.829 264.541,156.845 264.541,158.064 264.541,178.689 262.382,180.848 259.156,184.074 259.156,188.163 259.156,188.976 305.638,188.976 306.807,187.808 307.986,186.628 307.986,184.976 307.986,71.766 307.924,71.704 307.873,71.755 288.519,71.755 112.686,71.755 112.686,112.141
ISO on Bottom Layer "Bottom Layer-No Net" (solid, remove dead copper, pour order 10): 236.093,188.976 236.093,187.096 236.093,157.861 237.414,156.54 237.49,156.464 239.243,156.464 263.271,156.464 263.779,156.972 264.033,157.226 264.033,158.318 264.033,159.461 264.033,178.283 260.96,181.356 258.445,183.871 258.445,188.57 258.445,188.976 236.093,188.976

## Keep-outs
Keep-Out Layer:
  circle w0.2: c187.621,167.523 r2.5
  circle w0.2: c227.621,167.523 r2.5
  lines w0.2: 112.686,44.976 ccw(c116.686,44.976) 116.686,40.976 303.986,40.976 ccw(c303.986,44.976) 307.986,44.976 307.986,184.976 ccw(c303.986,184.976) 303.986,188.976 116.686,188.976 ccw(c116.686,184.976) 112.686,184.976 112.686,44.976 ; 114.193,68.634 cw(c115.193,68.634) 115.193,69.634 126.193,69.634 cw(c126.193,68.634) 127.193,68.634 cw(c126.193,68.634) 126.193,67.634 115.193,67.634 cw(c115.193,68.634) 114.193,68.634 ; 131.795,68.583 ccw(c132.795,68.583) 132.795,67.583 143.795,67.583 ccw(c143.795,68.583) 144.795,68.583 ccw(c143.795,68.583) 143.795,69.583 132.795,69.583 ccw(c132.795,68.583) 131.795,68.583 ; 149.346,68.583 ccw(c150.346,68.583) 150.346,67.583 161.346,67.583 ccw(c161.346,68.583) 162.346,68.583 ccw(c161.346,68.583) 161.346,69.583 150.346,69.583 ccw(c150.346,68.583) 149.346,68.583 ; 167.025,68.532 ccw(c168.025,68.532) 168.025,67.532 179.025,67.532 ccw(c179.025,68.532) 180.025,68.532 ccw(c179.025,68.532) 179.025,69.532 168.025,69.532 ccw(c168.025,68.532) 167.025,68.532 ; 184.449,68.583 ccw(c185.449,68.583) 185.449,67.583 196.449,67.583 ccw(c196.449,68.583) 197.449,68.583 ccw(c196.449,68.583) 196.449,69.583 185.449,69.583 ccw(c185.449,68.583) 184.449,68.583 ; 202.051,68.634 ccw(c203.051,68.634) 203.051,67.634 214.051,67.634 ccw(c214.051,68.634) 215.051,68.634 ccw(c214.051,68.634) 214.051,69.634 203.051,69.634 ccw(c203.051,68.634) 202.051,68.634 ; 247.085,68.609 cw(c248.085,68.609) 248.085,69.609 259.085,69.609 cw(c259.085,68.609) 260.085,68.609 cw(c259.085,68.609) 259.085,67.609 248.085,67.609 cw(c248.085,68.609) 247.085,68.609 ; 280.41,68.507 cw(c281.41,68.507) 281.41,69.507 292.41,69.507 cw(c292.41,68.507) 293.41,68.507 cw(c292.41,68.507) 292.41,67.507 281.41,67.507 cw(c281.41,68.507) 280.41,68.507

## Other copper
Top Layer:
  rectangle net GND: 244.678,108.839 250.495,114.859
Bottom Layer:
  rectangle net GND: 244.678,108.839 250.495,114.859
  region net NetCN16_2: 135.052,170.155 116.992,170.155 116.51,170.637 115.722,170.637 115.418,170.332 115.418,169.723 115.672,169.469 116.535,169.469 116.535,169.494 116.637,169.596 135.966,169.596 136.169,169.799 136.169,170.129 136.017,170.282 135.179,170.282

## Silkscreen, mask and mechanical layers (free items; w line width, h text height)
Top Overlay:
  text "RXD" at 194.437,151.181 h2 r90
  text "TXD" at 196.977,151.155 h2 r90
  text "BT0" at 199.542,151.155 h2 r90
  text "GND" at 191.897,151.105 h2 r90
  text "TCK" at 194.513,141.529 h2 r90
  text "TMS" at 197.079,141.402 h2 r90
  text "GND" at 191.846,141.326 h2 r90
  text "+3V3" at 199.771,140.945 h2 r90
  text "RXD" at 242.367,120.828 h1 r90
  text "BT0" at 247.447,120.802 h1 r90
  text "TXD" at 244.856,120.701 h1 r90
  text "GND" at 239.725,120.675 h1 r90
  text "TCK" at 241.935,112.903 h1 r90
  text "TMS" at 243.586,112.852 h1 r90
  text "GND" at 239.903,112.776 h1 r90
  text "+3V3" at 244.958,112.7 h1 r90
Bottom Solder:
  region: 120.04,131.699 118.161,129.819 115.595,129.819 115.316,129.54 115.316,128.93 115.468,128.778 118.593,128.778 120.472,130.658 133.858,130.658 134.188,130.988 134.188,131.445 133.934,131.699
  region: 130.454,136.881 128.524,134.95 115.748,134.95 115.418,134.62 115.418,133.96 115.748,133.629 128.905,133.629 130.912,135.636 133.858,135.636 134.214,135.992 134.214,136.576 133.909,136.881
  region: 116.535,127.635 115.849,126.949 115.849,126.619 116.053,126.416 116.408,126.416 116.713,126.721 116.713,126.873 116.891,127.051 135.738,127.051 136.017,127.33 136.017,127.533 135.915,127.635
  region: 135.026,132.715 116.611,132.715 115.722,131.826 115.722,131.547 115.926,131.343 116.307,131.343 116.789,131.826 116.789,132.055 116.891,132.156 135.738,132.156 136.119,132.486 136.119,132.613 135.89,132.842 135.153,132.842
  region: 116.967,174.346 115.468,172.847 115.468,172.263 115.722,172.009 116.357,172.009 117.45,173.101 133.985,173.101 134.315,173.431 134.315,173.99 133.96,174.346
  region: 119.278,169.139 118.237,168.097 115.697,168.097 115.418,167.818 115.418,167.183 115.595,167.005 116.459,167.005 116.586,167.081 118.567,167.081 119.609,168.123 134.061,168.123 134.315,168.377 134.315,168.834 134.01,169.139
  region: 135.255,165.1 116.942,165.1 116.459,165.583 115.494,165.583 115.341,165.43 115.341,164.744 115.595,164.49 116.662,164.49 116.688,164.516 136.169,164.516 136.398,164.744 136.398,165.049 136.22,165.227 135.331,165.227 135.255,165.151
  lines w0.6: 116.302,169.892 135.592,169.892
Mechanical 1:
  lines w0.2: 183.221,177.923 234.721,177.923 ; 185.421,167.523 231.221,167.523 ; 187.621,165.923 187.621,179.923 ; 191.621,165.523 191.621,180.823 ; 191.621,175.923 191.621,179.923 ; 195.621,165.923 195.621,179.923 ; 199.621,165.523 199.621,180.823 ; 199.621,175.923 199.621,179.923 ; 203.621,165.923 203.621,179.923 ; 203.621,165.523 203.621,169.523 ; 207.621,175.923 207.621,179.923 ; 211.621,165.523 211.621,169.523 ; 211.621,165.923 211.621,179.923 ; 215.621,165.523 215.621,180.823 ; 215.621,175.923 215.621,179.923 ; 219.621,165.523 219.621,169.523 ; 219.621,165.923 219.621,179.923 ; 223.621,165.523 223.621,180.823 ; 223.621,175.923 223.621,179.923 ; 227.621,165.623 227.621,180.923
Mechanical 15:
  circle w0.2: c161.621,183.523 r3
  circle w0.2: c253.621,183.523 r3
  circle w0.2: c171.221,108.523 r3
  circle w0.2: c247.621,111.923 r3